# Altium PCB Regulator MP1584EN.PcbDoc
Units mm, origin at the board's own origin, x right, y up, seen from the top; angles counter-clockwise.
Board outline 20.07 x 27.18 mm, 2 copper layers (Top Layer, Bottom Layer); 16 components, 11 nets, 43 pads, 10 vias.
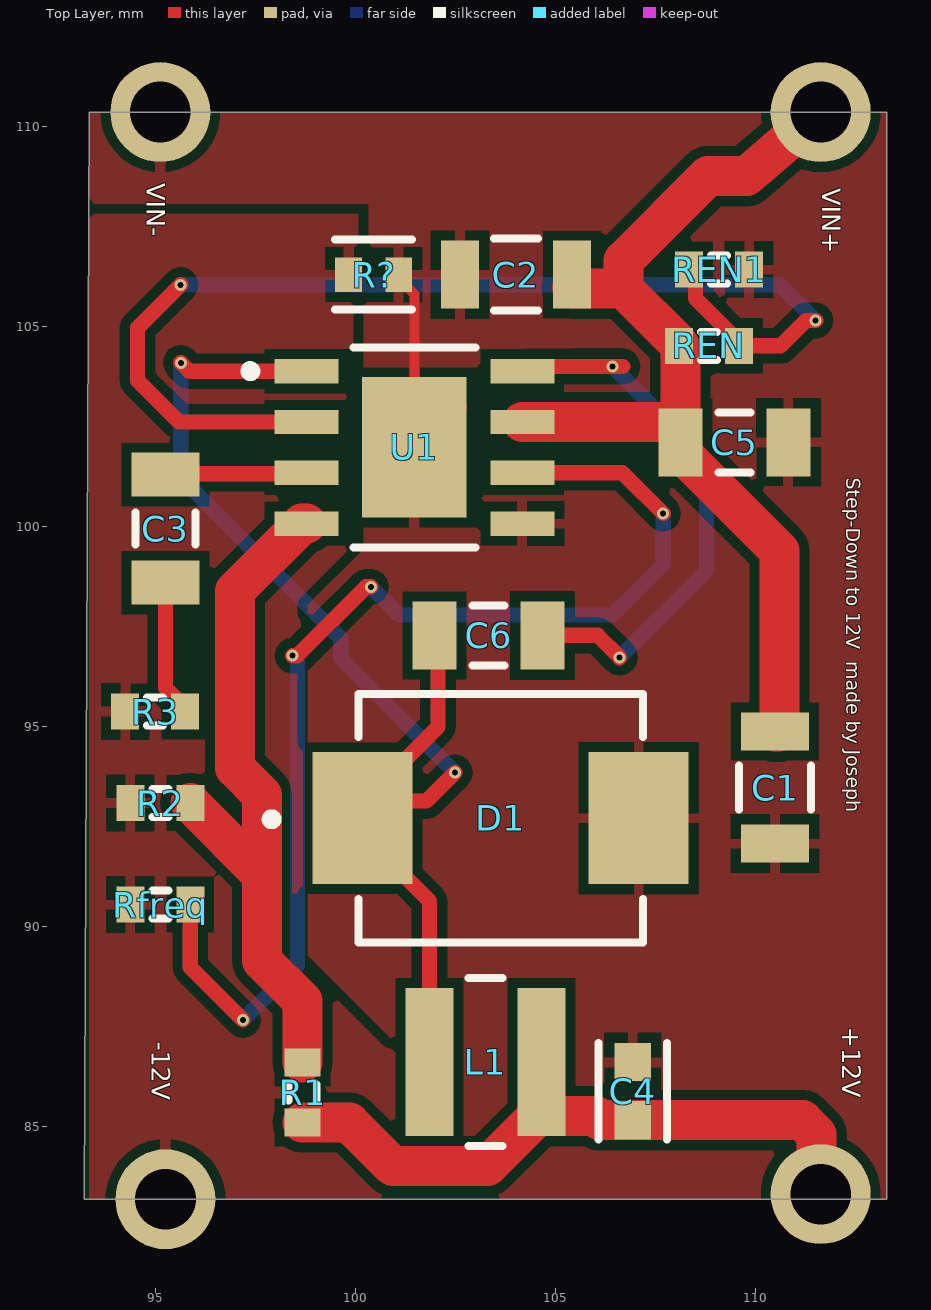
[diagram p0: Top Layer view]
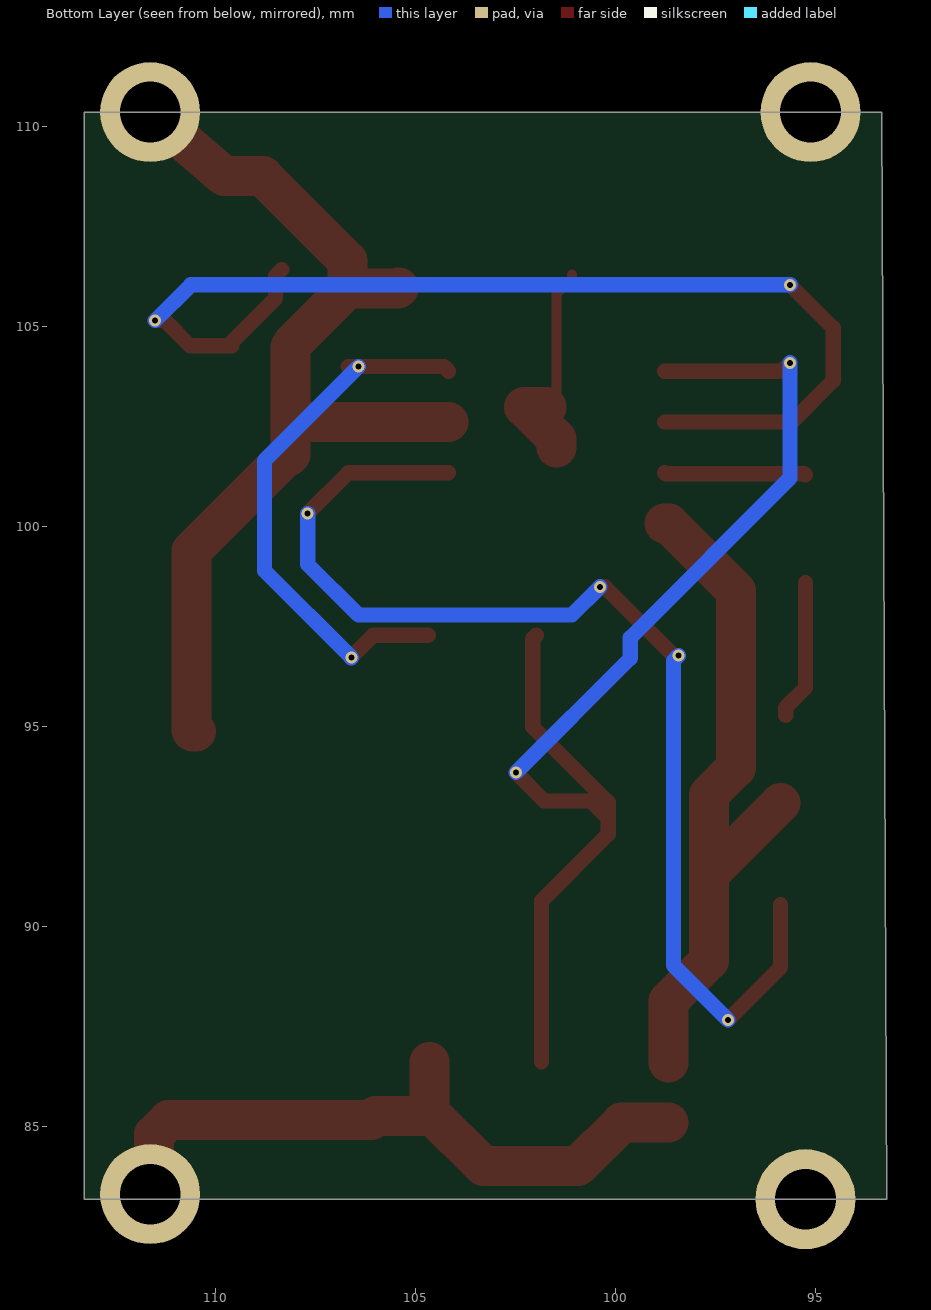
[diagram p1: Bottom Layer view, seen from below]

## Layer stack, top to bottom
Top Solder: solder mask 0.0102, Solder Resist, Dk 3.5
Top Layer: signal copper 0.0356
Dielectric 1: dielectric 0.32, FR-4, Dk 4.8
Bottom Layer: signal copper 0.0356
Bottom Solder: solder mask 0.0102, Solder Resist, Dk 3.5

## Board outline
93.345,110.363 113.284,110.363 113.284,83.185 93.218,83.185

## Design rules (kind name [scope] priority, off if disabled: settings)
Clearance [All] p1: gap=0.254 ignorepadtopadclearanceinfootprint=FALSE except(0: Arc-Hole Track-Hole SMDPad-Hole THPad-Hole Via-Hole Fill-Hole Poly-Hole Region-Hole Text-Hole)
PolygonConnect [All] p1: connectstyle=Relief reliefconductorwidth=0.254 reliefentries=4 polygonreliefangle="90 Angle" airgapwidth=0.254
RoutingVias [All] p1: holewidth=0.711 width=1.27 viastyle="Through Hole" minholewidth=0.711 minwidth=1.27 maxholewidth=0.711 maxwidth=1.27
ShortCircuit ShortCircuit_1 [InNet('DGND') vs InNet('PGND')] p1: allowed=TRUE
ShortCircuit [All] p2: allowed=FALSE
SilkToSilkClearance [All] p1: silktosilkclearance=0.15
SilkToSolderMaskClearance [IsPad] p1: minsilkscreentomaskgap=0.1 clearancetoexposedcopper=TRUE
SolderMaskExpansion [All] p1: expansion=0.102 istentingtop=FALSE
Width Width_1 [InNet('VOUT')] p1: maxlimit=1.3 minlimit=1 preferedwidth=1.25
Width [InNet('VIN')] p2: maxlimit=1.5 minlimit=1 preferedwidth=1.25
27 further rules are at their usual default settings.

## Components (designator, comment, footprint, x,y, rotation, side; value= is the part's Value field where it differs from the comment)
C1 "10uF" FP-C1206C-EB-MFG 110.49,93.475 r270 top value="10 μF"
C2 "10uF" FP-C1206C-EB-MFG 104.013,106.299 r180 top value="10 μF"
C3 "" C1206 95.25,99.949 r90 top value=150pF
C4 "Cout" FP-CL10-IPC_B 106.934,85.887 r90 top
C5 "CIN" C1206 109.474,102.108 r180 top value=100nF
C6 "Cbst" C1206 103.331,97.282 r180 top value=100nF
D1 "B340-13-F" FP-SMC-MFG 103.632,92.71 r0 top value=200pF
L1 "22µH" FP-NR4012-MFG 103.251,86.614 r0 top
R1 "Res3" J1-0603 98.679,85.852 r90 top value=592k
R2 "Res3" J1-0603 95.123,93.091 r0 top value=40.2K
R3 "Res3" J1-0603 94.996,95.377 r0 top value=147K
R? "MCT06030Z0000ZP500" FP-MCT0603-IPC_C 100.457,106.299 r0 top
REN "Res3" J1-0603 108.839,104.521 r180 top value=100K
REN1 "Res3" J1-0603 109.093,106.426 r0 top value=100K
Rfreq "Res3" J1-0603 95.123,90.551 r0 top value=390K
U1 "MP1584EN-LF-Z" FP-MP1584EN-LF-Z-MFG 101.473,101.981 r0 top

## Footprints (in the part's own frame and the unit in brackets; to place one, negate y for a bottom-side part, rotate by r counter-clockwise, add the part's x,y. Pads: shape width x height; smd on the part's side, far side on the other; paste and mask are expansions set on the pad)
C1206 [mm] "Chip Capacitor, Body 3.2x1.6mm, IPC High Density"
  rect 1.1x1.7 smd: 1(-1.35,0) 2(1.35,0)
  silkscreen extent -0.4,-0.75 0.4,0.75, body extent -1.7,-0.9 1.7,0.9, height 1.3
FP-C1206C-EB-MFG [mm]
  rect 0.95x1.7 smd paste+0 mask+0: 1(-1.4,0) 2(1.4,0)
  silkscreen extent -0.55,-0.9 0.55,0.9, body extent -2,-1 2,1, height 0.25
FP-CL10-IPC_B [mm]
  rect 0.958x0.912 smd paste+0 mask+0: 1(-0.727,0) 2(0.727,0)
  silkscreen extent -1.21,-0.86 1.21,0.86, body extent -1.46,-0.71 1.46,0.71, height 0.25
FP-MCT0603-IPC_C [mm]
  rect 0.664x0.862 smd paste+0 mask+0: 1(-0.629,0) 2(0.629,0)
  silkscreen extent -0.96,-0.87 0.96,0.87, body extent -1.06,-0.58 1.06,0.58, height 0.25
FP-MP1584EN-LF-Z-MFG [mm]
  rect 1.6x0.61 smd paste+0 mask+0: 1(-2.7,1.905) 2(-2.7,0.635) 3(-2.7,-0.635) 4(-2.7,-1.905) 5(2.7,-1.905) 6(2.7,-0.635) 7(2.7,0.635) 8(2.7,1.905)
  rect 2.62x3.51 smd paste+0 mask+0: 9(0,0)
  silkscreen extent -4.22,-2.5 1.53,2.5, body extent -3.6,-2.6 3.6,2.6, height 0.25
FP-NR4012-MFG [mm]
  rect 1.2x3.7 smd paste+0 mask+0: 1(-1.4,0) 2(1.4,0)
  silkscreen extent -0.43,-2.1 0.43,2.1, body extent -2.2,-2.2 2.2,2.2, height 0.25
FP-SMC-MFG [mm]
  rect 2.5x3.3 smd paste+0 mask+0: 1(-3.45,0) 2(3.45,0)
  silkscreen extent -5.85,-3.11 3.55,3.11, body extent -4.8,-3.21 4.8,3.21, height 0.25
J1-0603 [mm] "Chip Resistor, Body 1.6x0.8mm, IPC High Density"
  rect 0.7x0.9 smd: 1(-0.75,0) 2(0.75,0)
  silkscreen extent -0.2,-0.35 0.2,0.35, body extent -0.85,-0.48 0.85,0.48, height 0.9

## Part data
C1 C2: library part CMP-03020-005759-1, "CAP CER 10UF 50V X7R 1206", Capacitance="10 μF", Manufacturer=KEMET, Manufacturer Part Number=C1206C104K5RACAUTO, Package=C1206C-EB, Temperature="-55°C to +150°C", Temperature Characteristic=X7R, Temperature Coefficient=15%, Temperature Range High=+150°C, Temperature Range Low=-55°C, Tolerance=0.1, Voltage Rating="50 V", Automotive=Yes, Automotive Grade="Grade 0", Category=Cap, ComponentLink2Description=Datasheet, ComponentLink2URL=https://content.kemet.com/datasheets/KEM_C1007_X8R_ULTRA_150C_SMD.pdf, Device Class L1="Passive Components", Device Class L2=Capacitors, Device Class L3="Ceramic Capacitors", Digikey Description="CAP CER 0.1UF 50V X7R 1206", Height=0.88mm, Ipc Land Pattern Name=CAPC320160X78, Lead Free=Yes, Material=Ceramic, Mouser Description="Multilayer Ceramic Capacitors MLCC - SMD/SMT 0.1uF 50volts 10% X7R AUTO", Octopart=https://octopart.com/c1206c104k5racauto-kemet-12595586, RoHS=TRUE
C3 C5 C6: library part "Cap Semi", "Capacitor (Semiconductor SIM Model)", LatestRevisionDate=29-May-2009, LatestRevisionNote="IPC-7351 Footprint Added.", PackageDescription="Chip Capacitor", PackageReference=C1206, Published=8-Jun-2000, Publisher="Altium Limited"
C4: library part CMP-13271-002500-1, "Cap Ceramic 22uF 6.3V X5R ±20% Pad SMD 0603 +85°C T/R"
D1: library part CMP-12790-000049-1, "DIODE SCHOTTKY 40V 3A SMC", Capacitance=200pF, Forward Current=3A, Manufacturer="Diodes Inc.", Max Junction Temp=+150°C, Max Repetitive Reverse Voltage=40V, Max Surge Forward Current=100A, Package=SMC, Peak Reverse Current=0.1mA, Temperature="-55°C to +150°C", Temperature Range Low=-55°C, Automotive=No, Category=Diode, ComponentLink2Description=Datasheet, ComponentLink2URL=https://www.diodes.com/assets/Datasheets/ds30923.pdf, Device Class L1="Discrete Semiconductors", Device Class L2=Diodes, Device Class L3="Schottky Diodes", Digikey Description="DIODE SCHOTTKY 40V 3A SMC", Footprint Url=https://www.diodes.com/assets/Package-Files/SMC.pdf, Height=2.5mm, Lead Free=Yes, Manufacturer Part Number=B340-13-F, Mouser Description="Diode Schottky 40V 3A 2-Pin SMC T/R Diode Schottky 40V 3A 2-Pin SMC T/R", Octopart=https://octopart.com/b340-13-f-diodes+inc.-325814, Reverse Voltage=40V, RoHS=TRUE, Standoff Height=0.1mm, Temperature Range High=+150°C
L1: library part CMP-14484-000628-1, "SMD Power Inductors 22uH ±20% 0.5A 0.48Ω", Case/Package=Nonstandard, Current Rating=620mA, DC Resistance (DCR)=480mR, Inductance=22uH, Inductance Tolerance=20%, Max DC Current=500mA, Max Operating Temperature=125°C, Min Operating Temperature=-25°C, Package Quantity=4500, Resistor Type=Wirewound, Self Resonant Frequency=18MHz, Test Frequency=100kHz, Core Material=Ferrite, Depth=4.2mm, Halogen Free="Halogen Free", Height=1.2mm, Height - Seated (Max)=0.047inch, Lead Free="Lead Free", Lead Pitch=2.8mm, Length=4mm, Mount="Surface Mount", Number of Pins=2, Packaging="Tape and Reel", Radiation Hardening=No, RMS Current (Irms)=620mA, RoHS Compliant=Yes, Saturation Current=500mA, Series=NRS, Shielding=Shielded, Termination=SMD/SMT, Tolerance=20%, Width=0.157inch
R1 R2 R3 REN REN1 Rfreq: "Resistor", LatestRevisionDate=29-May-2009, LatestRevisionNote="IPC-7351 Footprint Added.", PackageDescription="Chip Resistor", PackageReference=J1-0603, Published=8-Jun-2000, Publisher="Altium Limited"
R?: library part CMP-02407-001385-1, "RES SMD 100 OHM 1% 1/8W 0603", Case Code (Imperial)=0603, Case Code (Metric)=1608, Max Operating Temperature=125°C, Max Power Dissipation=125mW, Min Operating Temperature=-55°C, Package Quantity=1, Power Rating=100mW, Resistance=0mR, Voltage Rating=75V, Case/Package=0603, Composition="Thin Film", Contact Plating=Tin, Depth=0.85mm, Height=0.022inch, Lead Free="Lead Free", Length=1.55mm, Military Standard=Not, Mount="Surface Mount", Number of Terminations=2, Packaging="Tape and Reel", Radiation Hardening=No, REACH SVHC="No SVHC", Voltage Rating (DC)=75V, Width=0.033inch
U1: library part CMP-57379-000006-1, "IC REG BUCK ADJ 3A", Ambient Temperature Range High=+85°C, Ambient Temperature Range Low=-20°C, Manufacturer="Monolithic Power Systems", Max Junction Temp=+125°C, Max Power Dissipation=2.5W, Max Supply Voltage=28V, Min Supply Voltage=4.5V, Nominal Supply Current=100uA, Output Current=3A, Output Voltage=0.8-25V, Switching Frequency=100-1500kHz, Temperature="-20°C to +125°C", Automotive=No, Category=IC, ComponentLink2Description=Datasheet, ComponentLink2URL=https://www.monolithicpower.com/en/documentview/productdocument/index/doc_url/L01QMTU4NF9yMS4wLnBkZg%3D%3D/release_date/MjAwOS0wNC0wOSAwMDowMDowMA%3D%3D/, Device Class L1="Integrated Circuits (ICs)", Device Class L2="Power Management ICs", Device Class L3="Voltage Regulators - Switching", Digikey Description="IC REG BUCK ADJ 3A", Height=1.7mm, Ipc Land Pattern Name=SOIC127P600X150-8, Lead Free=Yes, Manufacturer Part Number=MP1584EN-LF-Z, Number Of Outputs=1, Octopart=https://octopart.com/mp1584en-lf-z-monolithic+power+systems-18629680, Output Type=AdjustableProgrammable, Package=MP1584EN-LF-Z, RoHS=TRUE, Standoff Height=0mm, Switching Topology=Buck, Temperature Range High=+125°C, Temperature Range Low=-20°C

## Free pads (board coordinates)
  round 2.5 hole 1.519 mask+0: 19(111.633,110.363) 20(95.123,110.363) 21(95.25,83.185) 22(111.633,83.312)

## Via types
v1: diameter 0.3, hole 0.15, Top Layer to Bottom Layer, 10 vias

## Nets (pads, with @x,y where several pads share a name; then routed paths per layer and width w, separated by ;. In a path a pad name is that pad's centre, name@x,y a point inside that pad or via, vN(x,y) a via of type N, cw(c..) or ccw(c..) an arc to the next point about the centre after c; other vN are vias at no path point)
DGND: pad.21 R2.1 R3.1 R?.1 Rfreq.1
NetC3_1: C3.1 R3.2 | length 3.5
  Top Layer w0.381: C3.1 95.25,95.973 95.746,95.477 R3.2 R3.2@95.746,95.277
NetC3_2: C3.2 U1.3 | length 3.5
  Top Layer w0.381: C3.2 95.274,101.322 98.75,101.322 U1.3
NetC6_1: C6.1 U1.8 | length 13.9
  Top Layer w0.381: U1.8 104.288,104.001 105.471,104.001 105.475,104.005 v1(106.426,104.005) 106.682,104.005 ; C6.1 106.058,97.282 106.603,96.737 v1(106.603,96.725)
  Bottom Layer w0.381: v1(106.426,104.005) 108.775,101.656 108.775,98.897 v1(106.603,96.725)
NetC6_2: C6.2 D1.1 L1.1 U1.1 | length 31.3
  Top Layer w0.381: v1(95.635,104.097) 95.846,103.886 U1.1 ; L1.1 101.851,90.641 100.182,92.31 D1.1 ; C6.2 102.068,97.195 102.068,94.996 100.182,93.11 D1.1 ; v1(102.489,93.853) 101.78,93.144 100.616,93.144 D1.1
  Bottom Layer w0.381: v1(95.635,104.097) 95.635,101.218 99.632,97.221 99.632,96.71 v1(102.489,93.853)
NetR1_2: R1.2 R2.2 U1.4 | length 17.5
  Top Layer w1: R2.2 97.663,91.301 ; R1.2 98.679,88.138 97.663,89.154 97.663,91.301 ; U1.4 98.668,100.076 96.989,98.397 96.989,93.968 97.663,93.294 97.663,91.301
NetREN1_1: REN1.1 REN.1 U1.2 | length 28.3
  Top Layer w0.381: v1(95.631,106.045) 94.556,104.97 94.556,103.65 95.59,102.616 U1.2 ; REN1.1 108.503,106.267 108.503,105.707 109.589,104.621 REN.1 110.63,104.521 111.265,105.156 v1(111.506,105.156)
  Bottom Layer w0.381: v1(95.631,106.045) 110.617,106.045 v1(111.506,105.156)
NetRfreq_2: Rfreq.2 U1.6 | length 29.2
  Top Layer w0.381: Rfreq.2 95.873,88.98 v1(97.189,87.664) ; v1(98.425,96.774) 98.547,96.774 100.268,98.495 v1(100.389,98.495) ; U1.6 106.68,101.346 v1(107.696,100.33)
  Bottom Layer w0.381: v1(97.189,87.664) 98.552,89.027 98.552,96.647 v1(98.425,96.774) ; v1(100.389,98.495) 101.094,97.79 106.426,97.79 107.696,99.06 v1(107.696,100.33)
PGND: C1.2 C2.2 C4.2 C5.1 D1.2 pad.20 R?.2 REN1.2 U1.5 U1.9 | length 5.4
  Top Layer w0.25: R?.2 101.086,106.2 101.473,105.813 U1.9@101.473,102.997
  Top Layer w1: U1.9 101.473,102.187 102.283,102.997 U1.9@101.727,102.997
VIN: C1.1 C2.1 C5.2 pad.19 REN.2 U1.7 | length 25.3
  Top Layer w1: U1.7 107.916,102.616 C5.2@108.124,102.408 ; C2.1@105.41,105.977 105.438,105.949 106.702,105.949 ; C1.1 110.579,94.875 110.604,94.9 110.604,99.386 108.232,101.758 108.174,101.758 108.124,101.808 C5.2@108.124,102.408 ; pad.19 109.779,108.763 108.813,108.763 106.702,106.652 106.702,105.949 ; 106.702,105.949 108.071,104.58 108.071,104.539 REN.2 108.124,104.486 C5.2@108.124,102.408
VOUT: C4.1 L1.2 pad.22 R1.1 | length 16.9
  Top Layer w1: R1.1 99.847,85.102 100.939,84.01 103.297,84.01 L1.2@104.651,85.364 ; L1.2 L1.2@104.651,85.364 ; pad.22 111.533,83.412 111.533,84.801 111.174,85.16 C4.1 106.105,85.16 106.001,85.264 104.751,85.264 L1.2@104.651,85.364

## Polygon pours and split planes (outlines as drawn)
PGND on Top Layer "PGND_L01_P000" (solid, pour order 0): 93.345,110.363 113.284,110.363 113.284,83.185 101.219,83.185 101.219,86.868 98.806,89.281 98.806,98.044 100.203,99.441 100.203,105.664 100.457,105.664 100.33,105.791 100.33,108.077 93.472,108.077 93.345,108.204
DGND on Top Layer "DGND_L01_P002" (solid, pour order 2): 93.345,108.204 93.472,108.077 100.33,108.077 100.33,107.068 100.563,106.834 100.563,105.614 100.38,105.614 100.33,105.664 100.203,105.537 100.203,99.441 99.208,98.446 99.208,98.259 98.806,97.857 98.806,89.281 101.219,86.868 101.219,83.185 93.345,83.185

## Silkscreen, mask and mechanical layers (free items; w line width, h text height)
Top Overlay:
  text "VIN-" at 94.615,108.585 h0.8 r270
  text "VIN+" at 111.506,108.458 h0.8 r270
  text "Step-Down to 12V  made by Joseph" at 112.141,101.219 h0.6 r270
  text "+12V" at 112.014,87.503 h0.8 r270
  text "-12V" at 94.742,87.122 h0.8 r270